# EAGLE board BMX055 (EAGLE 6.6.0)
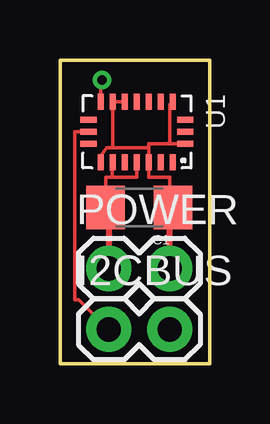
[diagram p0: board, top side]
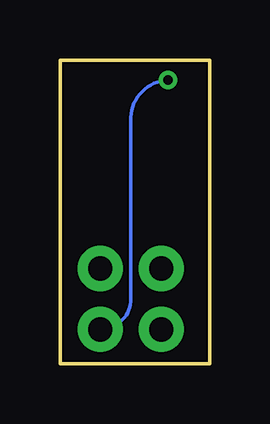
[diagram p1: board, bottom side, seen from below]

Size 6.25 x 12.65 mm. Coordinates in mm from the lower left corner, seen from the top.
Outline: 0,0 6.25,0 6.25,12.65 0,12.65 0,0
Copper layers (1*16): Top 0.0356mm / dielectric 1.5011mm / Bottom 0.0356mm
Design rules "LaenPCBOrder": minimum track width 6mil, minimum drill 13mil, track to track 6mil, track to pad 6mil, pad to pad 6mil, via to via 6mil, smd to smd 6mil, copper to edge 15mil, drill to drill 6mil, minimum pad ring 7mil, minimum via ring 7mil, stop-mask expansion 3mil, vias tented up to drill 0mil, thermal gap 10mil

## Footprints (pad centres in the part's own frame; a part is rotated, then mirrored left to right if it is on the bottom)
1206 = smd 1.6 x 1.8: 1 -1.4,0; 2 1.4,0
1X02 = drill 1.016 pad 1.88: 1 0,0; 2 2.54,0
BMX055 = smd 0.675 x 0.25: 1 1.262,1.5; 2 1.262,1; 3 1.262,0.5; 4 1.262,0; 5 1.262,-0.5; 6 1.262,-1; 7 1.262,-1.5; 11 -1.262,-1.5; 12 -1.262,-1; 13 -1.262,-0.5; 14 -1.262,0; 15 -1.262,0.5; 16 -1.262,1; 17 -1.262,1.5 | smd 0.25 x 0.675: 8 0.5,-2.013; 9 0,-2.013; 10 -0.5,-2.013; 18 -0.5,2.013; 19 0,2.013; 20 0.5,2.013

## Placement (x,y rotation side)
C1  100nF  [1206]  3.3,6.5 180 top
I2CBUS  M02PTH  [1X02]  2.03,1.42 0 top
POWER  M02PTH  [1X02]  2.03,3.96 0 top
U1  BMX055  [BMX055]  3.2,9.65 270 top

## Library data of the parts
C1 = SparkFun-Capacitors
I2CBUS POWER = SparkFun-Connectors
U1 = x-io

## Nets
GND: C1.2 POWER.1 U1.4 U1.6
N$1: I2CBUS.1 U1.9
N$2: I2CBUS.2 U1.11
VDD: C1.1 POWER.2 U1.3 U1.7 U1.12 U1.13 U1.17 U1.20

## Tracks (layer width: path | path; a pad name or v marks a point on that pad's centre or on a via)
GND
  Top 0.152: U1.4 3.2,7.77 2.18,7.77 | 2.18,7.77 2.18,8.39 U1.6 | C1.2 1.9,7.77 2.18,7.77
  Top 0.254: POWER.1 2.03,6.5 C1.2
N$1
  Top 0.152: U1.9 0.61,9.65 0.61,2.67 0.79,2.67 I2CBUS.1
N$2  (via drill 0.41)
  Top 0.152: U1.11 1.7,11.81 v1.75,11.81
  Bottom 0.152: v1.75,11.81 arc-90 3.3,10.11 3.3,2.69 arc90 I2CBUS.2
VDD
  Top 0.152: U1.13 U1.12 2.2,8.99 | U1.7 1.7,8.66 1.96,8.99 2.2,8.99 | 3.7,8.99 2.2,8.99 | 3.7,8.99 U1.3 3.7,7.77 4.57,7.77 4.57,6.5 | U1.20 4.57,9.15 | 4.57,9.15 3.7,9.15 3.7,8.99 | U1.17 4.57,10.79 4.57,9.15
  Top 0.254: POWER.2 4.57,6.5 C1.1